# EAGLE board BrainA2-A-24Sep2016 (EAGLE 8.6.0)
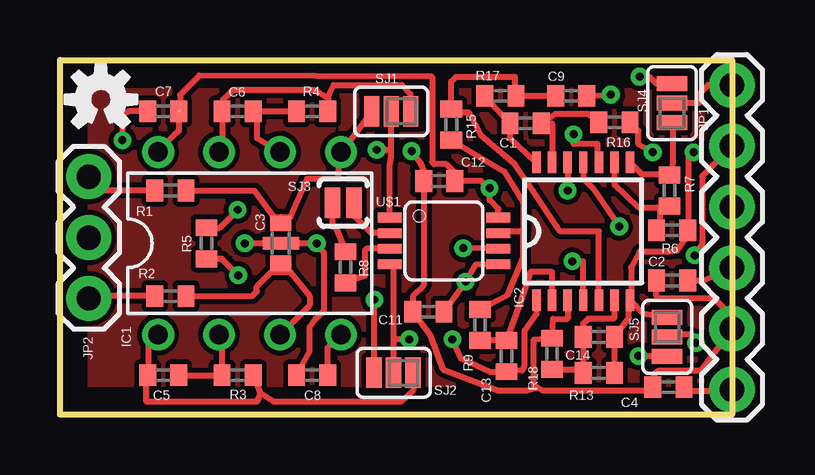
[diagram p0: board, top side]
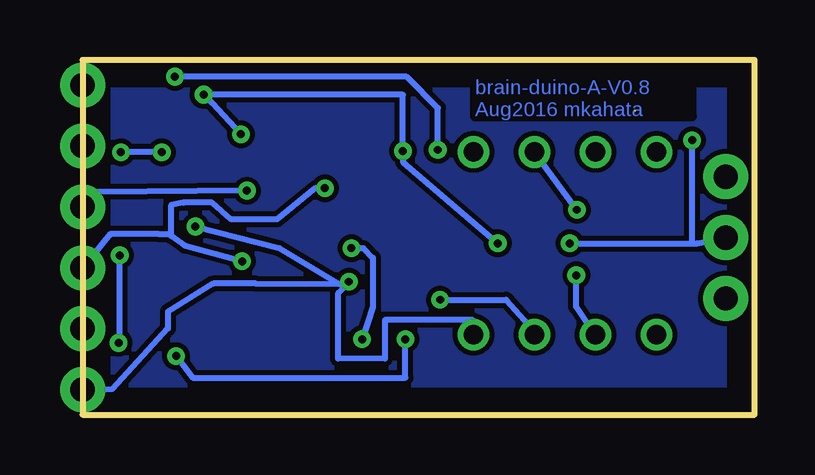
[diagram p1: board, bottom side, seen from below]

Size 28 x 14.8 mm. Coordinates in mm from the lower left corner, seen from the top.
Outline: 0,14.8 28,14.8 28,0 0,0 0,14.8
Copper layers (1*16): Top 0.035mm / dielectric 1.5mm / Bottom 0.035mm
Design rules "default *": minimum track width 10mil, minimum drill 24mil, track to track 8mil, track to pad 8mil, pad to pad 8mil, via to via 8mil, smd to smd 8mil, copper to edge 40mil, drill to drill 8mil, minimum pad ring 10mil, minimum via ring 8mil, stop-mask expansion 4mil, vias tented up to drill 0mil, thermal gap 10mil
Net classes: 0 default: clearance 0.205 mm

## Footprints (pad centres in the part's own frame; a part is rotated, then mirrored left to right if it is on the bottom)
C0402 = smd 0.7 x 0.9: 1 -0.65,0; 2 0.65,0
C0603 = smd 0.64 x 0.89: 1 -0.83,0; 2 0.83,0 | smd 0.51 x 1.52: GND 0,0
DIL08 = drill 0.813 pad 1.27: 1 -3.81,-3.81; 2 -1.27,-3.81; 3 1.27,-3.81; 4 3.81,-3.81; 5 3.81,3.81; 6 1.27,3.81; 7 -1.27,3.81; 8 -3.81,3.81
TSSOP14 = smd 0.9 x 0.35: 1 -2.875,1.95; 2 -2.875,1.3; 3 -2.875,0.65; 4 -2.875,0; 5 -2.875,-0.65; 6 -2.875,-1.3; 7 -2.875,-1.95; 8 2.875,-1.95; 9 2.875,-1.3; 10 2.875,-0.65; 11 2.875,0; 12 2.875,0.65; 13 2.875,1.3; 14 2.875,1.95
1X06 = drill 1.016 pad 1.88: 1 0,0; 2 2.54,0; 3 5.08,0; 4 7.62,0; 5 10.16,0; 6 12.7,0
1X03 = drill 1.016 pad 1.88: 1 0,0; 2 2.54,0; 3 5.08,0
R0402 = smd 0.7 x 0.9: 1 -0.65,0; 2 0.65,0
SJ_3_PASTE2&3 = smd 0.635 x 1.27: 1 -0.813,0; 2 0,0; 3 0.813,0
SJ_2S-NO = smd 0.635 x 1.27: 1 -0.45,0; 2 0.45,0
AD8220 = smd 0.4 x 1: 1 -0.976,-2.263; 2 -0.326,-2.263; 3 0.324,-2.263; 4 0.974,-2.263; 5 0.974,2.262; 6 0.324,2.262; 7 -0.326,2.262; 8 -0.976,2.262

## Placement (x,y rotation side)
C1  1µF  [C0402]  19.4,12.15 0 top
C2  2.2µF  [C0402]  25.5,5.6 0 top
C3  X2Y  [C0603]  9.2,7.15 270 top
C4  2.2µF  [C0402]  25.35,1.15 180 top
C5  4700pF  [C0402]  4.3,1.65 180 top
C6  4700pF  [C0402]  7.4,12.65 180 top
C7  0.1µF  [C0402]  4.3,12.65 0 top
C8  0.1µF  [C0402]  10.5,1.65 180 top
C9  47pF  [C0402]  21.3,13.3 180 top
C11  0.1µF  [C0402]  15.35,4.3 180 top
C12  0.1µF  [C0402]  15.8,9.75 0 top
C13  1µF  [C0402]  18.6,2.45 90 top
C14  47pF  [C0402]  22.45,3.25 0 top
IC1  OPA2111KP  [DIL08]  7.9,7.15 0 top
IC2  OP4177  [TSSOP14]  21.8,7.65 90 top
JP1  [1X06]  28,1.05 90 top
JP2  [1X03]  1.2,4.85 90 top
LOGO1  OSHW-LOGOS  [OSHW-LOGO-S]  1.7,13.15 0 top
R1  4.7K  [R0402]  4.6,9.35 0 top
R2  4.7K  [R0402]  4.6,4.95 0 top
R3  100K  [R0402]  7.4,1.65 0 top
R4  100K  [R0402]  10.5,12.65 0 top
R5  2K  [R0402]  6.1,7.15 270 top
R6  100K  [R0402]  25.5,7.7 0 top
R7  100K  [R0402]  25.4,9.35 270 top
R8  200  [R0402]  11.9,6.15 90 top
R9  1M  [R0402]  17.5,3.75 90 top
R13  1M  [R0402]  22.45,1.75 180 top
R15  4.02K  [R0402]  16.3,12.1 270 top
R16  1M  [R0402]  23.1,12.2 180 top
R17  1M  [R0402]  18.35,13.3 0 top
R18  4.02K  [R0402]  20.5,2.55 90 top
SJ1  [SJ_3_PASTE2&3]  13.8,12.65 0 top
SJ2  [SJ_3_PASTE2&3]  13.9,1.75 0 top
SJ3  SOLDERJUMPERNO  [SJ_2S-NO]  11.8,8.85 0 top
SJ4  [SJ_3_PASTE2&3]  25.5,13 270 top
SJ5  [SJ_3_PASTE2&3]  25.3,3.25 90 top
U$1  AD8422ARMZ  [AD8220]  16,7.25 270 top

## Library data of the parts
C1 C2 C4-C9 C11-C14 R1-R9 R13 R15-R18 = resistor
C3 = AD7173
IC1 = linear
IC2 = analog-devices; MPN: AD8544ARUZ; OC_FARNELL: unknown; OC_NEWARK: 15P1001
JP1 = SparkFun-Connectors; PROD_ID: CONN-08437
JP2 = SparkFun-Connectors
LOGO1 = SparkFun-Aesthetics
SJ1-SJ5 = SparkFun-Retired
U$1 = MKH

## Nets
GND: C2.1 C3.GND C4.2 C7.1 C8.2 C9.1 C11.2 C12.1 IC2.3 IC2.10 JP1.2 JP2.2 R18.2
N$1: JP2.3 R1.1
N$2: R8.2 SJ3.1
N$3: JP2.1 R2.1
N$4: C3.2 IC1.3 R2.2 SJ2.1
N$5: C3.1 IC1.5 R1.2 SJ1.1
N$6: IC2.9 R6.1 R7.2
N$8: C5.1 IC1.2 R3.1 R5.2
N$9: C6.1 IC1.6 R4.1 R5.1
N$14: SJ1.2 SJ4.1 U$1.1
N$15: SJ2.2 SJ5.1 U$1.4
N$17: C5.2 IC1.1 R3.2 SJ2.3
N$18: C6.2 IC1.7 R4.2 SJ1.3
N$19: R8.1 U$1.3
N$20: JP1.6 SJ4.2
N$21: C1.2 IC2.13 R16.2
N$23: SJ3.2 U$1.2
N$24: C9.2 IC2.5 R15.1 R17.2
N$25: R9.2 R15.2 U$1.7
N$26: C13.2 IC2.2 R9.1
N$29: C14.2 IC2.7 R6.2 R13.1 R16.1 SJ5.3
N$30: C13.1 IC2.1 U$1.6
N$31: C14.1 IC2.6 R13.2 R18.1
N$34: IC2.12 JP1.4
N$35: C1.1 IC2.14 R17.1
N$36: IC2.8 R7.1 SJ4.3
N$38: JP1.5 SJ5.2
V+: C2.2 C7.2 C12.2 IC1.8 IC2.4 JP1.3 U$1.8
V-: C4.1 C8.1 C11.1 IC1.4 IC2.11 JP1.1 U$1.5

## Tracks (layer width: path | path; a pad name or v marks a point on that pad's centre or on a via)
GND  (via drill 0.33)
  Top 0.254: IC2.3 21.15,4 20.55,4 R18.2 19.74,3.14 19.74,1.23 | 19.74,1.23 19.87,1.12 19.45,1 18.3,1 15.95,1.9 15.4,3.35 C11.2 14.7,4.95 15.15,5.4 C12.1 15.15,10.2 15.05,10.45 v14.65,11 | v2.6,11.45 2.6,12.55 2.92,12.67 3.47,12.67 3.49,12.65 C7.1 | IC2.10 22.45,10.7 22.4,10.75 22.4,11.3 21.4,11.3 v21.4,11.7 21.4,11.75 | C8.2 10.4,2.65 10.4,3.65 10.65,4 11,4.35 11,6.75 v10.7,7.15 C3.GND v7.7,7.15 | 19.74,1.23 20.12,1 24.55,1 24.7,1.2 C4.2 24.75,1.7 24.95,1.85 26.71,1.85 JP1.2 28,4.1 27.25,4.85 24.95,4.85 24.85,4.95 C2.1 | C9.1 v22.95,13.35
  Bottom 0.254: 2.6,7.15 v2.6,11.45 | v7.7,7.15 2.6,7.15 | 2.6,7.15 2.4,7.15 JP2.2 | v10.7,7.15 14.65,10.55 v14.65,11 14.65,13.35 v22.95,13.35 22.6,13 v21.4,11.7
N$1
  Top 0.254: R1.1 1.74,9.35 1.36,9.63 JP2.3
N$2
  Top 0.254: R8.2 11.49,7.81 11.35,7.85 SJ3.1
N$3
  Top 0.254: R2.1 1.74,4.95 1.5,4.91 JP2.1
N$4  (via drill 0.33)
  Top 0.254: 9.2,5.95 8.8,5.95 8.2,5.35 8.2,5.15 8,4.95 R2.2 | 9.2,5.95 9.6,5.95 10.4,4.95 10.4,4.57 IC1.3 | C3.2 9.2,5.95 | SJ2.1 13.09,3.66 v13.1,4.8
  Bottom 0.254: v13.1,4.8 10.35,4.8 9.4,3.75 9.2,3.57 IC1.3
N$5
  Top 0.254: R1.2 8.1,9.35 8.9,8.25 9.2,8.25 | 9.2,8.25 9.6,8.25 10.3,9.85 11.6,9.85 11.6,10.85 IC1.5 12.4,11.85 SJ1.1 | C3.1 9.2,8.25
N$6
  Top 0.254: IC2.9 23.1,9.6 24.1,8.65 24.85,8.65 R7.2 25,8.5 25,7.4 R6.1
N$8  (via drill 0.33)
  Top 0.254: C5.1 R3.1 6.75,3.02 IC1.2 | v7.43,5.81 6.74,6.5 R5.2
  Bottom 0.254: IC1.2 7.43,4.51 v7.43,5.81
N$9  (via drill 0.33)
  Top 0.254: 9.02,11.05 IC1.6 8.97,11.06 8.22,11.52 8.22,12.61 C6.1 R4.1 | R5.1 6.65,7.8 v7.4,8.55
  Bottom 0.254: v7.4,8.55 7.46,8.6 IC1.6
N$10
  pour Bottom: 0,14.8 28,14.8 28,0 0,0
N$11
  pour Top: 0,14.8 28,14.8 28,0 0,0
N$14  (via drill 0.33)
  Top 0.254: U$1.1 13.74,10.39 13.8,10.75 13.8,11.1 | 13.8,11.1 SJ1.2 | SJ4.1 24.84,13.81 24.55,14.1 v24.15,14.1 | v13.2,11.05 13.6,11.05 13.8,11.1
  Bottom 0.254: v13.2,11.05 13.2,12.8 14.5,14.1 v24.15,14.1
N$15  (via drill 0.33)
  Top 0.254: SJ2.2 13.9,3.15 | 13.9,3.15 13.9,6.11 U$1.4 | v14.55,3.15 13.9,3.15 | v24.1,2.45 25.29,2.45 SJ5.1
  Bottom 0.254: v24.1,2.45 23.4,1.55 14.55,1.55 v14.55,3.15
N$17
  Top 0.254: R3.2 8.35,0.9 | 8.35,0.9 8.2,0.55 3.6,0.55 3.6,1.5 C5.2 3.65,1.93 3.68,1.93 3.7,1.95 3.7,2.95 IC1.1 | 8.35,0.9 8.9,0.55 14.2,0.55 14.71,1.01 SJ2.3
N$18
  Top 0.254: 6.91,12.44 C6.2 | C6.2 6.8,12.5 6.8,13.15 7.2,13.55 10.6,13.55 11.15,13.2 R4.2 11.2,12.65 11.2,13.35 11.4,13.75 14.25,13.75 14.6,13.39 SJ1.3 | C6.2 6.75,11.08 IC1.7
N$19
  Top 0.254: U$1.3 12.78,6.93 12.7,6.85 12.7,5.8 11.95,5.55 R8.1
N$20
  Top 0.254: JP1.6 27,13.75 26.65,13.4 26.65,13 SJ4.2
N$21
  Top 0.254: IC2.13 20.5,12.15 C1.2 20.65,12.55 22,12.55 R16.2
N$23
  Top 0.254: U$1.2 12.97,7.58 12.3,8.25 12.3,8.45 | 12.3,8.45 12.3,9.04 | SJ3.2 12.35,8.5 12.3,8.45
N$24
  Top 0.254: IC2.5 22.45,7.65 20.85,7.65 20.7,7.85 19.7,9.35 18.95,10.45 17.55,11.65 17.05,12.6 16.45,12.6 | C9.2 R17.2 19.1,13.5 18.95,13.8 18.95,14.1 16.5,14.1 16.3,13.9 16.3,12.65 16.35,12.6 16.45,12.6 | 16.45,12.6 R15.1
N$25
  Top 0.254: 19.3,7.65 18.34,7.65 U$1.7 | R9.2 18.65,5 19.3,6.55 19.3,7.65 | R15.2 18.5,10.15 19.3,8.85 19.3,7.65
N$26
  Top 0.254: IC2.2 20.5,5.95 19.6,5.95 19.2,4.75 C13.2 R9.1
N$29  (via drill 0.33)
  Top 0.254: R13.1 C14.2 23.7,4.05 23.7,4.33 IC2.7 | IC2.7 23.8,4.83 23.8,6.15 24.15,6.8 25.4,6.8 25.7,6.85 26.15,7.5 R6.2 26.2,7.5 26.2,10.9 v26.4,10.95 | v24.7,10.95 24.1,11.3 24.1,11.85 R16.1 | IC2.7 24.31,4.21 SJ5.3
  Bottom 0.254: v24.7,10.95 v26.4,10.95
N$30  (via drill 0.33)
  Top 0.254: U$1.6 17.88,6.93 16.9,6.95 v16.8,6.95 | v16.35,3.15 16.7,2.35 17.9,1.8 C13.1 | 18.85,1.75 C13.1 | IC2.1 19.85,4.2 19.35,3.5 19.35,2.1 19.3,1.9 19.25,1.85 C13.1
  Bottom 0.254: v16.35,3.15 15.9,4.5 15.9,6.55 16.3,6.95 v16.8,6.95
N$31
  Top 0.254: R18.1 21.5,1.9 R13.2 C14.1 21.8,3.8 22,4 23.05,4 23.1,4.05 IC2.6
N$34  (via drill 0.33)
  Top 0.254: IC2.12 v21.15,9.35
  Bottom 0.254: v21.15,9.35 27.37,9.3 JP1.4
N$35
  Top 0.254: R17.1 C1.1 18.75,11.55 IC2.14
N$36
  Top 0.254: 25.28,10.02 25.53,10.33 25.55,10.6 25.55,12.14 SJ4.3 | 25.28,10.02 24.25,10.02 IC2.8 | R7.1 25.3,10 25.28,10.02
N$38  (via drill 0.33 pad 0.25)
  Top 0.254: JP1.5 26.75,9.95 26.75,7.15 26.6,6.8 v26.45,6.65 | v26.5,3 26.5,3.15 26.3,3.35 25.6,3.35 SJ5.2
  Bottom 0.254: v26.5,3 26.45,3.15 v26.45,6.65
V+  (via drill 0.33)  (1 unrouted)
  Top 0.254: IC1.8 4.16,11.06 4.78,11.7 4.95,11.83 C7.2 | U$1.8 18.26,8.59 17.9,8.95 v17.9,9.45 17.85,9.45 17.55,9.75 C12.2 16.45,10.1 | 5,12.7 5,13.35 5.8,14.15 15.5,14.1 15.5,10.55 15.6,10.45 16.1,10.45 16.45,10.1 | IC2.4 21.8,6.4 v21.35,6.4 | C2.2 26.82,5.6 JP1.3 | 16.55,10.1 16.45,10.1
  Bottom 0.254: v21.35,6.4 23.73,7.05 24.3,7.45 | v17.9,9.45 18.3,9.45 19.9,8.15 21.8,8.15 22.6,8.85 23.8,8.85 24.3,8.75 24.3,7.45 | 24.3,7.45 24.4,7.55 24.82,7.53 26.85,7.53 JP1.3
V-  (via drill 0.33)
  Top 0.254: C11.1 v16.9,5.55 17.35,6.29 U$1.5 | v23.3,7.85 22.2,9.45 21.8,9.85 IC2.11 | C4.1 25.9,0.99 27.94,0.99 JP1.1 | C8.1 11.15,2.78 IC1.4
  Bottom 0.254: IC1.4 11.75,3.34 11.75,3.95 15.4,3.95 15.4,2.35 17.35,2.34 17.34,5.09 v16.9,5.55 17.3,5.45 | v23.3,7.85 19.8,6.95 17.3,5.45 | 17.3,5.45 20.78,5.47 22.55,5.47 24.45,4.3 24.45,3.6 26.77,1.07 JP1.1

## Text on the board
Bottom: brain-duino-A-V0.8 / Aug2016 mkahata